# Altium PCB CPLD_Programmer.PcbDoc
Units mm, origin at the board's own origin, x right, y up, seen from the top; angles counter-clockwise.
Board outline 30 x 20 mm, 2 copper layers (Top Layer, Bottom Layer), stack 1.271 mm thick; 29 components, 51 nets, 142 pads, 54 vias.
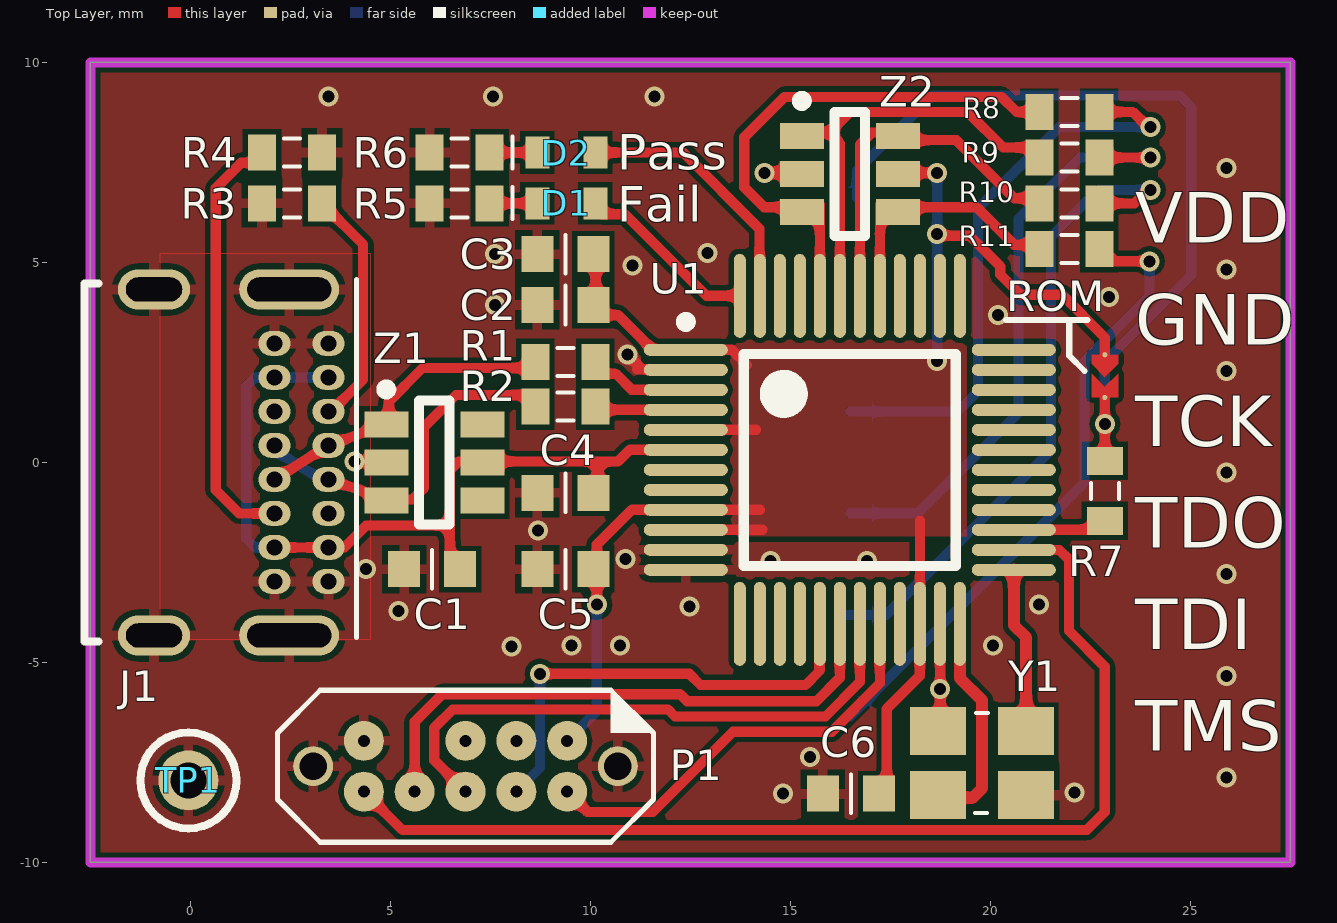
[diagram p0: Top Layer view]
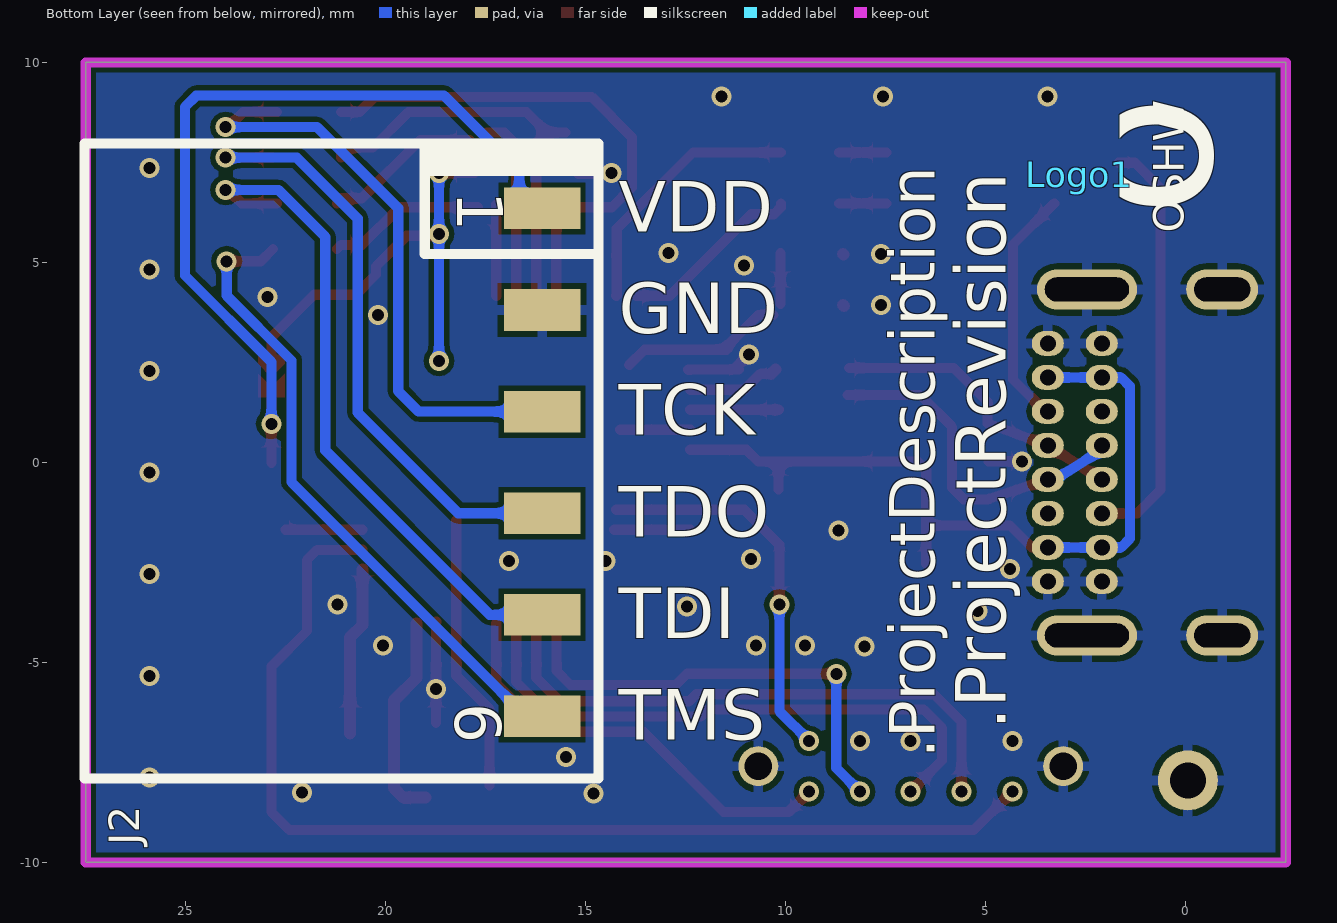
[diagram p1: Bottom Layer view, seen from below]
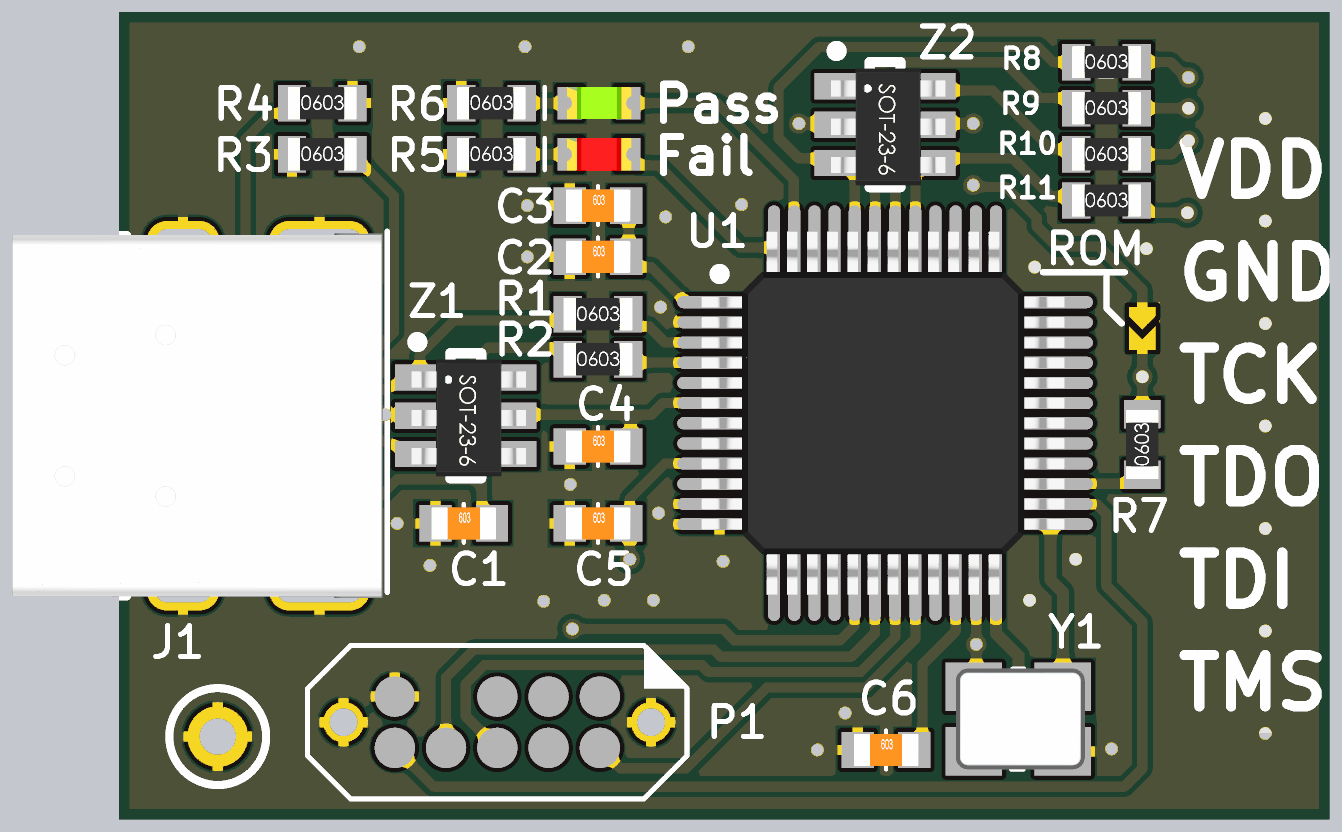
[diagram p2: 3D render of the assembled board from above, using the file's embedded part models]

## Layer stack, top to bottom
Top Solder: solder mask 0.0102, Solder Resist, Dk 3.5
Top Layer: signal copper 0.0356
Dielectric 1: dielectric 1.2, FR-4, Dk 4.8
Bottom Layer: signal copper 0.0356
Bottom Solder: solder mask 0.0102, Solder Resist, Dk 3.5

## Board outline
-2.5,-10 27.5,-10 27.5,10 -2.5,10

## Design rules (kind name [scope] priority, off if disabled: settings)
AssemblyTestPointUsage SilkToBoardRegionClearance_1 [All] p2:
AssemblyTestPointUsage SilkToBoardRegionClearance [All] p3:
Clearance [All] p1: gap=0.127 ignorepadtopadclearanceinfootprint=FALSE
HoleSize [All] p1: absolutevalues=TRUE maxlimit=6.35 minlimit=0.25 maxpercent=80.000 minpercent=20.000
MatchedLengths DiffPair_DIFF100MatchedLengths [InDifferentialPairClass('DIFF100')] p1: tolerance=0.152 checknetsindiffpair=TRUE checkdiffpairvsdiffpair=FALSE checkxsignals=FALSE checkothers=FALSE
MinimumAnnularRing [All] p1: minimumring=0.089
MinimumSolderMaskSliver [All] p1 off: minsoldermaskwidth=0.1
MinimumSolderMaskSliver SilkscreenOverComponentPads_2 [All] p2 off: minsoldermaskwidth=0.254
MinimumSolderMaskSliver SilkToSolderMaskClearance_1 [IsPad] p3 off: minsoldermaskwidth=0.254
MinimumSolderMaskSliver SilkscreenOverComponentPads_1 [All] p4 off: minsoldermaskwidth=0.254
MinimumSolderMaskSliver SilkToSolderMaskClearance [IsPad] p5 off: minsoldermaskwidth=0.254
MinimumSolderMaskSliver SilkscreenOverComponentPads [All] p6 off: minsoldermaskwidth=0.254
NetAntennae [All] p1 off: netantennaetolerance=0
PlaneClearance [All] p1: clearance=0.254
PlaneConnect [All] p1: planeconnectstyle=Relief reliefexpansion=0.508 reliefentries=4 reliefconductorwidth=0.254 reliefairgap=0.152
PolygonConnect PolygonConnect_Via [IsVia] p1: connectstyle=Direct reliefconductorwidth=0.254 reliefentries=4 polygonreliefangle="90 Angle" airgapwidth=0.254
PolygonConnect [All] p2: connectstyle=Relief reliefconductorwidth=0.254 reliefentries=4 polygonreliefangle="90 Angle" airgapwidth=0.152
RoomDefinition CPLD_Programmer [InComponentClass('CPLD_Programmer')] p1: confinementstyle=ConfineIn formatcopy=TRUE lockcomponents=FALSE outline -11.326,-12.556 49.634,-12.556 49.634,12.844 -11.326,12.844
RoutingVias [All] p1: holewidth=0.305 width=0.635 viastyle="Through Hole" minholewidth=0.305 minwidth=0.635 maxholewidth=0.711 maxwidth=1.27
SilkToBoardRegionClearance SilkToBoardRegionClearance_2 [All] p1 off:
SilkToSilkClearance [All] p1 off: silktosilkclearance=0.254
SilkToSolderMaskClearance SilkToSolderMaskClearance_2 [IsPad] p1 off: minsilkscreentomaskgap=0.254 clearancetoexposedcopper=TRUE
SolderMaskExpansion [All] p1: expansion=0.102
Width [All] p1: maxlimit=2.54 minlimit=0.152 preferedwidth=0.254
22 further rules are at their usual default settings.

## Components (designator, comment, footprint, x,y, rotation, side; value= is the part's Value field where it differs from the comment)
C1 "100nF" CCNP1608-0603_N 6.045,-2.667 r0 top
C2 "2.2uF" CCNP1608-0603_N 9.373,3.937 r0 top
C3 "100nF" CCNP1608-0603_N 9.373,5.207 r0 top
C4 "100nF" CCNP1608-0603_N 9.373,-0.762 r0 top
C5 "100nF" CCNP1608-0603_N 9.373,-2.667 r0 top
C6 "100nF" CCNP1608-0603_N 16.51,-8.28 r0 top
D1 "LED Red" LED1608-0603-RED_N 9.398,6.477 r0 top
D2 "LED Green" LED1608-0603-GREEN_N 9.398,7.747 r0 top
J1 "USB4085-GF-A" USB4085-GF-A 1.27,0 r0 top locked
J2 "Header, 6-Pin" SAMTEC-SMH-106-02-X-S 23.368,0 r270 bottom locked
Logo1 "OSHW Logo" OSHW 2.667,7.188 r90 bottom
P1 "SWD Connector 2x5-Pin" SWD-2x5-Jig-Pads 9.417,-6.96 r180 top
R1 "330R" CR1608-0603_N 9.373,2.515 r0 top
R2 "330R" CR1608-0603_N 9.373,1.397 r0 top
R3 "5.1K" CR1608-0603_N 2.54,6.477 r0 top
R4 "5.1K" CR1608-0603_N 2.54,7.747 r0 top
R5 "1K" CR1608-0603_N 6.731,6.477 r0 top
R6 "1K" CR1608-0603_N 6.731,7.747 r0 top
R7 "10K" CR1608-0603_N 22.86,-0.711 r90 top
R8 "100R" CR1608-0603_N 21.971,8.763 r0 top
R9 "100R" CR1608-0603_N 21.971,7.62 r0 top
R10 "100R" CR1608-0603_N 21.971,6.477 r0 top
R11 "100R" CR1608-0603_N 21.971,5.334 r0 top
ROM "LinkOpen" SolderBridge(Open) 22.86,2.159 r270 top
TP1 "TP" TP -0.051,-7.95 r0 top
U1 "MK20DX128VLF5" TSQFP50P900X900-48M 16.485,0.064 r270 top locked
Y1 "16 MHz" Crystal_SMD_3.2x2.5 19.787,-7.518 r0 top
Z1 "CM1293A-04SO" SOT457_N 6.096,0 r0 top
Z2 "CM1293A-04SO" SOT457_N 16.485,7.214 r0 top

## Footprints (in the part's own frame and the unit in brackets; to place one, negate y for a bottom-side part, rotate by r counter-clockwise, add the part's x,y. Pads: shape width x height; smd on the part's side, far side on the other; paste and mask are expansions set on the pad)
CCNP1608-0603_N [mm]
  rect 0.8x0.9 smd: 1(-0.7,0) 2(0.7,0)
  silkscreen extent 0,-0.48 0,0.48, body extent -0.8,-0.4 0.8,0.4, height 0.3
CR1608-0603_N [mm]
  rect 0.7x0.9 smd: 1(-0.75,0) 2(0.75,0)
  silkscreen extent -0.2,-0.35 0.2,0.35, body extent -0.85,-0.4 0.85,0.4, height 0.56
Crystal_SMD_3.2x2.5 [mm] "Crystal SMT low profile 3.2 x 2.5 SMD"
  rect 1.4x1.2 smd: 1(-1.1,-0.8) 2(1.1,-0.8) 3(1.1,0.8) 4(-1.1,0.8)
  silkscreen extent -0.17,-1.25 0.15,1.25, body extent -1.55,-1.24 1.65,1.26, height 0.7
LED1608-0603-GREEN_N [mm] "SMT-LED 0603"
  rect 0.6x0.8 smd: A(0.725,0) K(-0.725,0)
  silkscreen extent -1.35,-0.39 -1.35,0.41, body extent -0.8,-0.4 0.8,0.4, height 0.7
LED1608-0603-RED_N [mm] "SMT-LED 0603"
  rect 0.6x0.8 smd: A(0.725,0) K(-0.725,0)
  silkscreen extent -1.35,-0.39 -1.35,0.41, body extent -0.8,-0.4 0.8,0.4, height 0.7
OSHW [mm] "OSHW Logo"
SAMTEC-SMH-106-02-X-S [mil]
  rect 40.95x75.2 smd: 1(-250,286.5) 2(-150,286.5) 3(-50,286.5) 4(50,286.5) 5(150,286.5) 6(250,286.5)
  silkscreen extent -314,-164 311,342, body extent -310,-162 310,308, height 95
SolderBridge(Open) [mil]
  round 5 smd paste-5 mask+0: 1(-21,0) 2(21,0)
  Top Layer region: -2.5,13 10.5,0 -2.5,-13 21,-13 21,13
  Top Layer region: -21,13 -12,13 1,0 -12,-13 -21,-13
SOT457_N [mm] "SOT23, 6-Leads, Body 2.9x1.5mm, Pitch 0.95mm, Lead Span 2.8mm, IPC Medium Density"
  rect 1.1x0.65 smd: 1(-1.2,0.95) 2(-1.2,0) 3(-1.2,-0.95) 4(1.2,-0.95) 5(1.2,0) 6(1.2,0.95)
  silkscreen extent -1.32,-1.55 0.38,1.95, body extent -1.34,-1.5 1.5,1.4, height 1.21
SWD-2x5-Jig-Pads [mm] "Connector; SWD; 2x5 Position"
  round 1 hole 0.69: 0(-1.27,0.635) 0(6.35,0.635)
  round 1 smd: 1(0,0) 2(0,1.27) 3(1.27,0) 4(1.27,1.27) 5(2.54,0) 6(2.54,1.27) 8(3.81,1.27) 9(5.08,0) 10(5.08,1.27)
  silkscreen extent -2.16,-1.26 7.24,2.53
TP [mm] "Testpoint (small)"
  round 1.5 hole 0.9: 1(0,0)
  silkscreen extent -1.2,-1.2 1.2,1.2
TSQFP50P900X900-48M [mm] "Thin QFP, 48-Leads, Body 7x7mm, Pitch 0.5mm, IPC Low Density"
  oval 0.3x2.1 smd: 1(-2.75,-4.1) 2(-2.25,-4.1) 3(-1.75,-4.1) 4(-1.25,-4.1) 5(-0.75,-4.1) 6(-0.25,-4.1) 7(0.25,-4.1) 8(0.75,-4.1) 9(1.25,-4.1) 10(1.75,-4.1) 11(2.25,-4.1) 12(2.75,-4.1) 25(2.75,4.1) 26(2.25,4.1) 27(1.75,4.1) 28(1.25,4.1) 29(0.75,4.1) 30(0.25,4.1) 31(-0.25,4.1) 32(-0.75,4.1) 33(-1.25,4.1) 34(-1.75,4.1) 35(-2.25,4.1) 36(-2.75,4.1)
  oval 2.1x0.3 smd: 13(4.1,-2.75) 14(4.1,-2.25) 15(4.1,-1.75) 16(4.1,-1.25) 17(4.1,-0.75) 18(4.1,-0.25) 19(4.1,0.25) 20(4.1,0.75) 21(4.1,1.25) 22(4.1,1.75) 23(4.1,2.25) 24(4.1,2.75) 37(-4.1,2.75) 38(-4.1,2.25) 39(-4.1,1.75) 40(-4.1,1.25) 41(-4.1,0.75) 42(-4.1,0.25) 43(-4.1,-0.25) 44(-4.1,-0.75) 45(-4.1,-1.25) 46(-4.1,-1.75) 47(-4.1,-2.25) 48(-4.1,-2.75)
  silkscreen extent -3.57,-4.22 2.65,2.65, body extent -4.5,-4.55 4.5,4.45, height 1.6
USB4085-GF-A [mm] "USB-C Connector"
  oval 0.8x0.62 hole 0.4: A1(2.18,2.975) A4(2.18,2.125) A5(2.18,1.275) A6(2.18,0.425) A7(2.18,-0.425) A8(2.18,-1.275) A9(2.18,-2.125) A12(2.18,-2.975) B1(0.83,-2.975) B4(0.83,-2.125) B5(0.83,-1.275) B6(0.83,-0.425) B7(0.83,0.425) B8(0.83,1.275) B9(0.83,2.125) B12(0.83,2.975)
  oval 1.8x1 hole 0.6 slot 1.4 at 0 deg: SH(-2.18,-4.325) SH(-2.18,4.325)
  oval 2.5x1 hole 0.6 slot 2.1 at 0 deg: SH(1.2,-4.325) SH(1.2,4.325)
  silkscreen extent -3.92,-4.47 2.88,4.57, body extent -6.41,-4.52 2.76,4.51, height 3.46

## Part data
C1 C3 C4 C5 C6: library part Cap_CCNP_0603, "Capacitor non-polar SMT 0603", LCSC=C14663, Manufacturer="Generic Components", Class=Passive, Published=08/06/2000, Publisher="Altium Hobart Technology Centre", SubClass=Capacitor
C2: library part Cap_CCNP_0603, "Capacitor non-polar SMT 0603", LCSC=C23630, Manufacturer="Generic Components", Class=Passive, Published=08/06/2000, Publisher="Altium Hobart Technology Centre", SubClass=Capacitor
D1: library part LED-0603-Red, "LED 0603 Red", LCSC=C2286, Manufacturer="Generic Components", Class I=Optoelectronic, Class II=LED, Farnell PN=1581239, Published=8-Jun-2000, Publisher="Altium Limited", Revision="July-2002: Re-released for DXP Platform."
D2: library part LED-0603-Green, "LED 0603 Green", LCSC=C72043, Manufacturer="Generic Components", Class I=Optoelectronic, Class II=LED, Farnell PN=1581242, Published=8-Jun-2000, Publisher="Altium Limited", Revision="July-2002: Re-released for DXP Platform."
J1: "USB-C, USB 2.0 Receptacle Connector 16 Position Through Hole, Right Angle", Digikey Part Number=2073-USB4085-GF-ACT-ND, Angle=90, Digikey=2073-USB4085-GF-ACT-ND, Digikey Link=https://www.digikey.ee/product-detail/en/gct/USB4085-GF-A/2073-USB4085-GF-ACT-ND/9859733, Farnell PN=2924867, Part Number=USB4085-GF-A
J2: library part "Header Female 1x6H-SMT", Digikey=SAM15786-ND, Farnell PN="2084265 (sim)", LatestRevisionDate=17-Jul-2002, LatestRevisionNote="Re-released for DXP Platform.", Publisher="Altium Limited", SAMTEC=SW-106-02-G-S-RA
P1: library part SWD2X5_JIG, Farnell PN=1865285, LatestRevisionDate=17-Jul-2002, LatestRevisionNote="Re-released for DXP Platform.", Publisher="Altium Limited"
R1 R2 R8 R9 R10 R11: library part Res_CR0603, "Resistor SMT 0603", LCSC=C22775, Manufacturer="Generic Components", Class=Passive, Published=08/06/2000, Publisher="Altium Hobart Technology Centre", SubClass=Resistor
R3 R4: library part Res_CR0603, "Resistor SMT 0603", LCSC=C23186, Manufacturer="Generic Components", Class=Passive, Published=08/06/2000, Publisher="Altium Hobart Technology Centre", SubClass=Resistor
R5 R6: library part Res_CR0603, "Resistor SMT 0603", LCSC=C21190, Manufacturer="Generic Components", Class=Passive, Published=08/06/2000, Publisher="Altium Hobart Technology Centre", SubClass=Resistor
R7: library part Res_CR0603, "Resistor SMT 0603", Manufacturer="Generic Components", Class=Passive, Published=08/06/2000, Publisher="Altium Hobart Technology Centre", SubClass=Resistor
TP1: "Test Point"
U1: "Arm Cortex M4"
Y1: library part "Crystal 16MHz", "Crystal SMD 3.2 x 2.5 x 0.7 mm", LCSC=C13738, Manufacturer="Generic Components", Class=Oscillator, Published=08/06/2000, Publisher="Altium Hobart Technology Centre", SubClass="Crystal Oscillator"
Z1 Z2: "Ultra low capacitance quadruple rail-to-rail ESD protection", LCSC=C393377, Digikey=CM1293A-04SOOSCT-ND, Farnell PN=2533258

## Via types
v1: diameter 0.5, hole 0.3, Top Layer to Bottom Layer, tented both sides, 45 vias
v2: diameter 0.5, hole 0.3, Top Layer to Bottom Layer, tented bottom, 9 vias

## Nets (pads, with @x,y where several pads share a name; then routed paths per layer and width w, separated by ;. In a path a pad name is that pad's centre, name@x,y a point inside that pad or via, vN(x,y) a via of type N, cw(c..) or ccw(c..) an arc to the next point about the centre after c; other vN are vias at no path point)
3V3: C2.2 C3.2 C5.2 C6.2 P1.1 ROM.1 U1.1 U1.5 U1.9 U1.10 U1.22 Z2.5 | length 37.2
  Top Layer w0.254: C2.2@10.132,3.962 C3.2@10.132,5.232 ; v1(10.16,-3.556) 10.16,-2.057 11.035,-1.182 U1.9@12.437,-1.182 ; C2.2@10.312,3.683 10.693,3.683 U1.1@11.559,2.818 ; U1.1@11.487,2.818 U1.1@11.559,2.818 ; U1.10@12.381,-1.676 12.387,-1.682 14.294,-1.682 ; U1.9@12.387,-1.182 14.238,-1.182 ; U1.5@12.387,0.818 14.143,0.818 ; 13.913,2.438 13.534,2.818 U1.1@11.559,2.818 ; C6.2@17.41,-8.077 17.41,-6.161 18.237,-5.335 18.237,-1.448 ; Z2.5@17.782,7.239 v1(18.669,7.239) ; v1(18.669,5.715) 18.716,5.668 19.478,5.668 20.244,4.902 20.244,4.699 20.752,4.191 21.793,4.191 22.86,3.124 ROM.1
  Bottom Layer w0.254: v2(9.417,-6.96) 10.16,-6.217 v1(10.16,-3.556) ; v1(18.669,2.54) v1(18.669,5.715) v1(18.669,7.239)
5V: C1.2 C4.2 J1.A4 J1.A9 J1.B4 J1.B9 U1.6 Z1.5 | length 21.5
  Top Layer w0.254: J1.B4 J1.A9 3.845,-2.125 4.393,-1.575 6.488,-1.575 ; C1.2@6.488,-2.54 6.488,-1.575 ; C4.2@10.181,-0.674 10.181,0.025 ; U1.6@12.387,0.318 10.986,0.318 10.693,0.025 10.181,0.025 ; 6.488,-1.575 6.488,-0.192 6.706,0.025 10.181,0.025
  Bottom Layer w0.254: J1.A9@3.263,-2.125 J1.B4 1.617,-2.125 1.397,-1.905 1.397,1.905 1.617,2.125 J1.B9 J1.A4@3.263,2.125
ADC0_DM0: U1.8
ADC0_DP0: U1.7
EXTAL: U1.25 Y1.3 | length 4.2
  Top Layer w0.3: U1.25@20.587,-2.682 20.587,-4.066 20.895,-4.375 Y1.3@20.895,-6.779
EXTAL32: U1.15
GND: C1.1 C2.1 C3.1 C4.1 C5.1 C6.1 J1.A1 J1.A12 J1.B1 J1.B12 J1.SH J2.2 P1.0 P1.3 P1.5 P1.9 R3.1 R4.2 R5.1 R6.1 TP1.1 U1.2 U1.11 U1.12 U1.23 Y1.2 Y1.4 Z1.2 Z2.2 | length 6
  Top Layer w0.254: v1(4.1,0.025) Z1.2@4.926,0.025 ; v1(10.871,-2.413) v1@10.871,-2.403 ; v1(10.922,2.692) 10.931,2.692 11.297,2.327 ; 11.17,2.327 12.378,2.327 12.387,2.318 U1.2@12.437,2.318 ; U1.23@18.737,-3.982 18.745,-3.991 v1(18.745,-5.664) Y1.4@18.745,-6.507
  Top Layer w0.3: C2.1@8.543,3.912 C2.1@8.569,3.937 ; C3.1@8.554,5.193 C3.1@8.569,5.207 ; v1(14.351,7.239) Z2.2@15.179,7.239
  other v1: 14.808,-8.28 22.098,-8.255 25.908,-7.874 15.494,-7.366 25.908,-5.334 8.026,-4.597 9.525,-4.572 10.744,-4.572 20.066,-4.572 5.207,-3.708 12.471,-3.607 21.209,-3.556 25.908,-2.794 4.394,-2.667 14.503,-2.464 16.916,-2.464 8.687,-1.702 25.908,-0.254 25.908,2.286 20.193,3.683 7.62,3.937 22.962,4.14 25.908,4.826 11.049,4.928 7.62,5.207 12.929,5.232 25.908,7.366 3.454,9.144 7.564,9.144 11.608,9.144
  other v2: 4.337,-6.96 6.877,-6.96 8.147,-6.96
Grn_LED: D2.A U1.47 | length 6.6
  Top Layer w0.254: D2.A 12.319,7.747 14.224,5.842 14.224,4.18 U1.47@14.237,4.168
NetD1_K: D1.K R5.2 | length 1.2
  Top Layer w0.254: R5.2 D1.K
NetD2_K: D2.K R6.2 | length 1.2
  Top Layer w0.254: R6.2 D2.K
NetJ1_A5: J1.A5 R3.2 | length 6
  Top Layer w0.254: R3.2 4.318,5.449 4.318,2.073 J1.A5@3.52,1.275
NetJ1_B5: J1.B5 R4.1 | length 10.3
  Top Layer w0.254: R4.1@1.676,7.493 1.27,7.493 0.635,6.858 0.635,-0.691 1.219,-1.275 J1.B5@1.867,-1.275
PTA4: U1.21
PTB1: U1.28
PTB2: U1.29
PTB3: U1.30
PTB16: U1.31
PTB17: U1.32
PTC0: U1.33
PTC1: U1.34
PTC2: U1.35
PTC3: U1.36
PTC4: U1.37
PTC5: U1.38
PTC6: U1.39
PTC7: U1.40
PTD4: U1.45
Red_LED: D1.A U1.48 | length 4.6
  Top Layer w0.254: D1.A 10.123,6.377 10.296,6.204 10.866,6.204 12.902,4.168 U1.48@13.737,4.168
RESETB: P1.10 U1.26 | length 27.3
  Top Layer w0.254: v2(4.337,-8.23) 5.298,-9.19 22.41,-9.19 22.86,-8.74 22.86,-5.105 21.968,-4.213 21.968,-2.435 21.724,-2.191 20.595,-2.191 U1.26@20.587,-2.182
SWD_CLK: P1.4 U1.17 | length 11.6
  Top Layer w0.254: v1(8.738,-5.283) 12.471,-5.283 12.751,-5.563 15.381,-5.563 15.728,-5.216 15.728,-4.041 U1.17@15.737,-4.032
  Bottom Layer w0.254: v2(8.147,-8.23) 8.738,-7.639 v1(8.738,-5.283)
SWD_DIO: P1.2 U1.20 | length 10.9
  Top Layer w0.254: v2(9.417,-8.23) 9.925,-8.738 11.557,-8.738 13.564,-6.731 16.033,-6.731 17.237,-5.527 U1.20@17.237,-4.032
SWD_RX: P1.8 U1.18 | length 14.3
  Top Layer w0.254: v2(5.607,-8.23) 5.607,-6.483 6.295,-5.795 12.243,-5.795 12.417,-5.969 15.652,-5.969 16.237,-5.385 U1.18@16.237,-4.032
SWD_TX: P1.6 U1.19 | length 14.6
  Top Layer w0.254: v2(6.877,-8.23) 6.095,-7.447 6.095,-6.636 6.554,-6.176 11.942,-6.176 12.116,-6.35 15.875,-6.35 16.737,-5.488 U1.19@16.737,-4.032
TCK: J2.3 R8.2 | length 14.6
  Top Layer w0.254: R8.2 23.555,8.763 23.928,8.39 23.995,8.39 v1(24.003,8.382)
  Bottom Layer w0.254: J2.3@16.51,1.27 19.177,1.27 19.689,1.782 19.689,6.354 21.717,8.382 v1(24.003,8.382)
TCK_R: R8.1 U1.44 Z2.3 | length 13
  Top Layer w0.254: Z2.3@15.291,6.38 14.346,6.38 13.847,6.879 13.847,8.132 14.854,9.139 20.274,9.139 20.65,8.763 R8.1@21.121,8.763 ; U1.44@15.737,4.168 Z2.3@15.737,6.452
TDI: J2.5 R10.2 | length 16.6
  Top Layer w0.254: R10.2 23.6,6.477 23.936,6.814 v1(24.003,6.814)
  Bottom Layer w0.254: J2.5@16.383,-3.81 17.399,-3.81 21.514,0.305 21.514,5.639 22.689,6.814 v1(24.003,6.814)
TDI_R: R10.1 U1.42 Z2.6 | length 8.6
  Top Layer w0.254: U1.42@16.737,4.168 16.737,7.95 17.031,8.245 Z2.6@17.461,8.245 ; Z2.6@17.914,8.057 19.146,8.057 20.599,6.604 21.094,6.604 R10.1
TDO: J2.4 R9.2 | length 15.2
  Top Layer w0.254: R9.2@22.821,7.62 v1(24.003,7.62)
  Bottom Layer w0.254: J2.4@16.51,-1.27 18.186,-1.27 20.701,1.245 20.701,6.096 22.225,7.62 v1(24.003,7.62)
TDO_R: R9.1 U1.43 Z2.1 | length 10.6
  Top Layer w0.254: Z2.1@15.508,8.245 15.967,8.245 ; U1.43@16.237,4.168 16.237,7.976 15.967,8.245 ; R9.1@21.121,7.62 21.121,7.874 20.32,7.874 19.436,8.758 16.481,8.758 15.967,8.245
TMS: J2.6 R11.2 | length 15.8
  Top Layer w0.254: R11.2@22.821,5.334 23.126,5.029 v1(23.978,5.029)
  Bottom Layer w0.254: J2.6@16.499,-6.35 22.356,-0.493 22.356,2.549 23.978,4.171 v1(23.978,5.029)
TMS_R: R11.1 U1.41 Z2.4 | length 6.2
  Top Layer w0.254: U1.41@17.237,4.168 Z2.4@17.237,6.452 ; Z2.4@17.691,6.38 19.655,6.38 20.597,5.438 21.117,5.438 R11.1
USB_DM: R2.2 U1.4 | length 2.2
  Top Layer w0.254: R2.2@10.171,1.318 U1.4@12.387,1.318
  Top Layer w0.3: R2.2@10.269,1.314 R2.2@10.272,1.318
USB_DP: R1.2 U1.3 | length 2.3
  Top Layer w0.254: R1.2@10.369,2.215 10.638,2.215 11.035,1.818 U1.3@12.387,1.818
  Top Layer w0.3: R1.2@10.262,2.321 R1.2@10.369,2.215
USBD_R_N: J1.A7 J1.B7 R2.1 Z1.3 | length 8.7
  Top Layer w0.254: J1.A7 4.91,-0.909 4.958,-0.925 5.552,-0.925 5.842,-0.635 5.842,0.889 6.64,1.687 R2.1@8.458,1.687
  Bottom Layer w0.254: J1.B7@1.913,0.425 2.047,0.341 J1.A7@3.263,-0.425 ; J1.A7@3.205,-0.443 J1.A7@3.217,-0.45
USBD_R_P: J1.A6 J1.B6 R1.1 Z1.1 | length 7.5
  Top Layer w0.254: J1.B6 J1.A6 Z1.1@4.895,0.953 ; Z1.1@4.958,0.975 4.958,1.52 5.8,2.362 R1.1@8.415,2.362
VBAT: U1.16
Vref: J2.1 R7.2 ROM.2 | length 20.4
  Top Layer w0.254: R7.2@22.86,-0.012 v1(22.86,0.965) ROM.2
  Bottom Layer w0.254: J2.1@16.664,6.609 16.664,7.291 18.542,9.169 24.74,9.169 25.019,8.89 25.019,4.674 22.86,2.515 v1(22.86,0.965)
Vref_R: R7.1 U1.27 | length 1.9
  Top Layer w0.254: U1.27@20.587,-1.682 R7.1@22.51,-1.682
VREFO: U1.13
XTAL: U1.24 Y1.1 | length 5.2
  Top Layer w0.3: Y1.1@19.002,-8.379 19.561,-8.379 19.795,-8.145 19.795,-5.952 19.237,-5.394 U1.24@19.237,-4.032
XTAL32: U1.14
pads on no net: J1.A8 J1.B8 U1.46 Z1.4 Z1.6

## Polygon pours and split planes (outlines as drawn)
no net on Top Layer "Top Layer-No Net" (solid, remove dead copper, pour order 10): -0.76,5.224 4.501,5.224 4.501,-4.428 -0.76,-4.428
GND on Top Layer "Top Layer-No Net" (solid, remove dead copper, pour order 8): -2.5,-10 -2.5,10 27.5,10 27.5,-10
3V3 on Top Layer "Top Layer-No Net" (solid, pour order 6): 13.491,4.099 19.408,4.099 19.408,-1.841 13.491,-1.841
GND on Bottom Layer "Top Layer-No Net" (solid, remove dead copper, pour order 7): -2.286,10 27.5,10 27.5,-10 -2.286,-10

## Keep-outs
Keep-Out Layer:
  the board outline again, w0.254

## Silkscreen, mask and mechanical layers (free items; w line width, h text height)
Top Overlay:
  lines w0.152: 20.396,3.556 22.428,3.556 ; 21.971,3.556 21.971,2.667 22.352,2.286
  text "Pass" at 10.668,7.315 h0.89
  text "Fail" at 10.668,6.02 h0.89
  text "VDD" at 23.622,5.486 h1.27
  text "GND" at 23.622,2.946 h1.27
  text "TCK" at 23.622,0.406 h1.27
  text "TDO" at 23.622,-2.134 h1.27
  text "TDI" at 23.622,-4.674 h1.27
  text "TMS" at 23.622,-7.214 h1.27
Bottom Overlay:
  text "VDD" at 14.173,5.766 h1.27
  text "GND" at 14.173,3.226 h1.27
  text "TCK" at 14.173,0.686 h1.27
  text "TDO" at 14.173,-1.854 h1.27
  text "TDI" at 14.173,-4.394 h1.27
  text ".ProjectRevision" at 4.496,-6.68 h1.27 r270
  text "TMS" at 14.173,-6.934 h1.27
  text ".ProjectDescription" at 6.274,-7.391 h1.14 r270

## Dimensions
-2.5,10 to 27.5,10 on Mechanical 1
-2.5,-10 to -2.5,10 on Mechanical 1

## Text inside footprints (layer, text, board x,y; h text height)
J2: Bottom Overlay "6" at 18.644,-6.02 h1.97 r90; Bottom Overlay "1" at 18.593,6.782 h1.97 r90; Mechanical 40 "12.700" at 13.716,0.8 h0.39 r90; Mechanical 40 "15.748" at 30.455,0.8 h0.39 r90; Mechanical 40 "2.540" at 13.018,10.185 h0.39 r90; Mechanical 40 "8.509" at 23.495,10.744 h0.39 r90; Mechanical 16 "6" at 16.726,-8.665 h1.97 r90; Mechanical 16 "1" at 16.726,9.694 h1.97 r90
Logo1: Bottom Overlay "OSHW" at 0.051,5.74 h0.76 r270; Bottom Overlay "o" at -2.565,9.195 h10.16 r270